# Altium PCB controler_pcb.PcbDoc
Units mil, origin at the board's own origin, x right, y up, seen from the top; angles counter-clockwise.
Board outline 1420 x 1860 mil, 2 copper layers (Top Layer, Bottom Layer); 10 components, 27 nets, 71 pads, 1 vias.
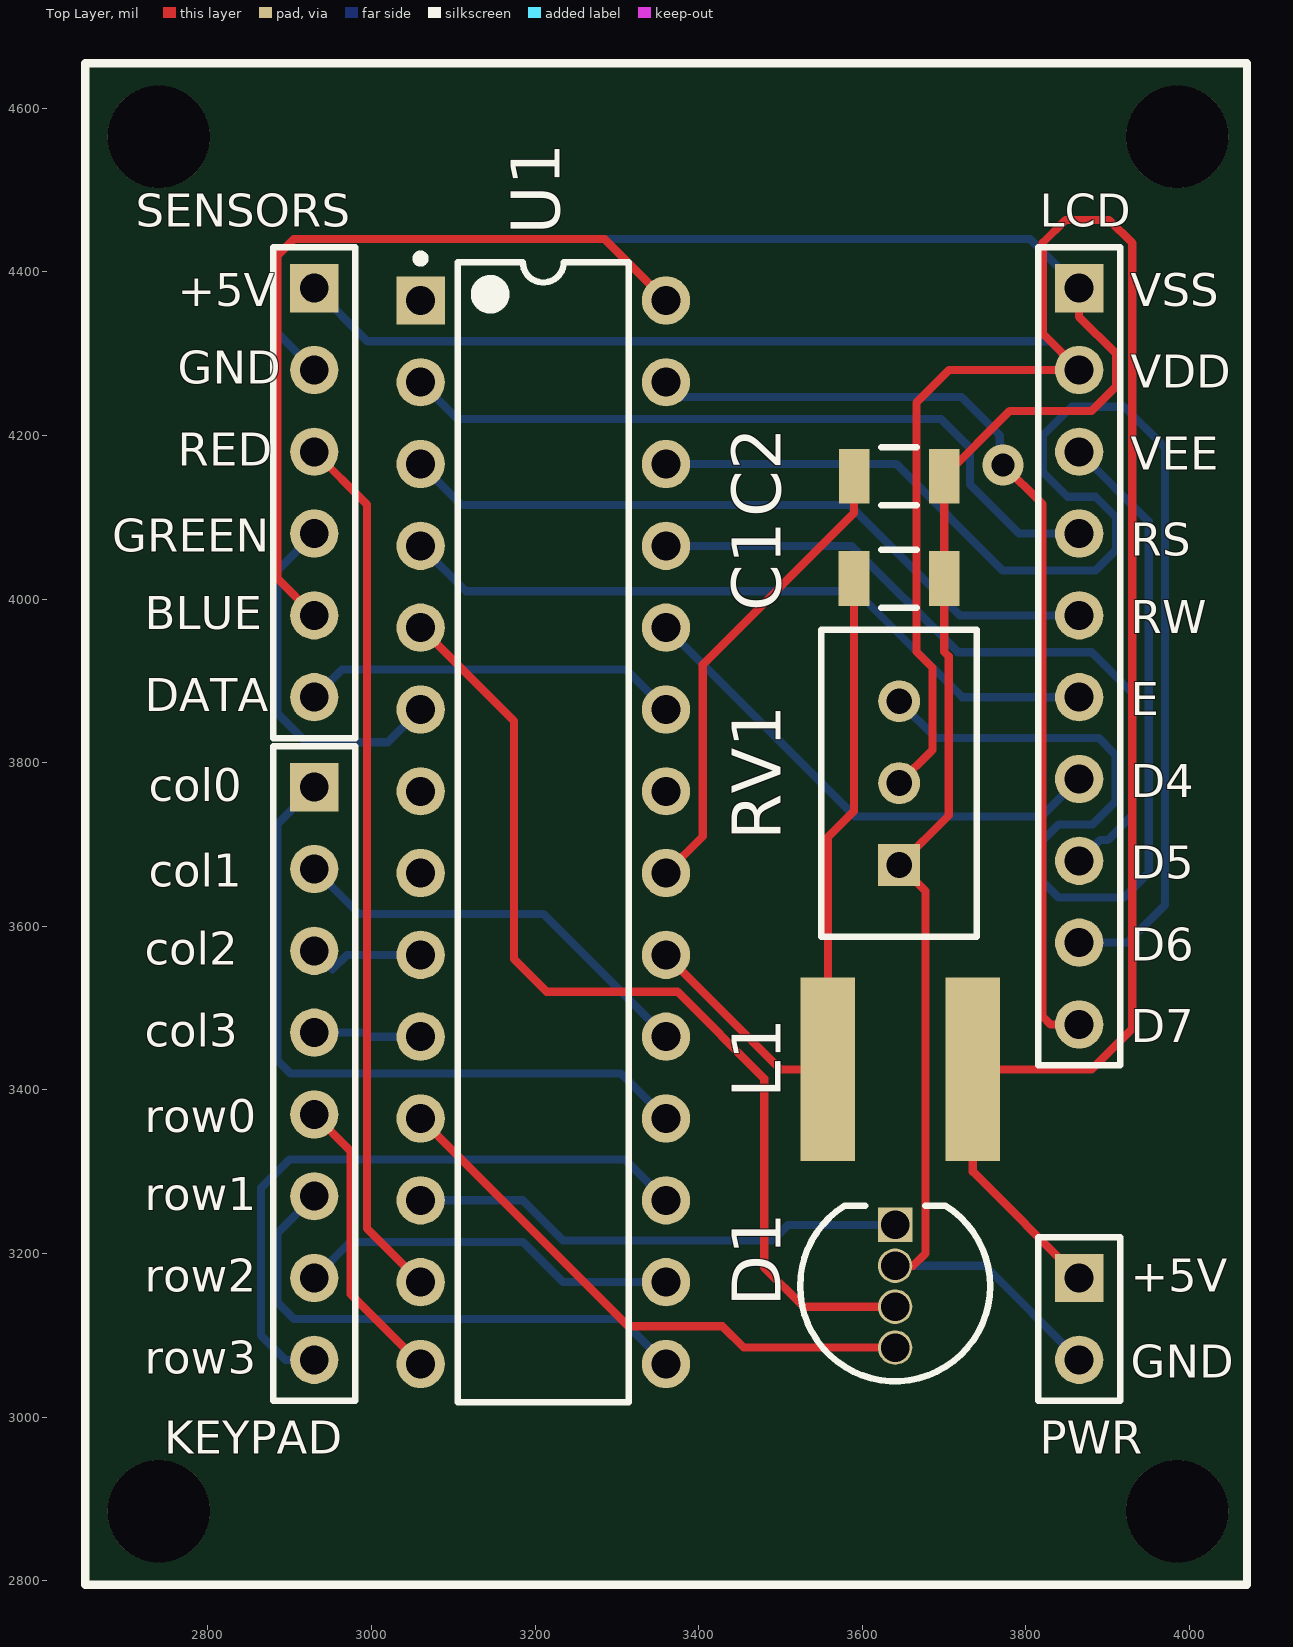
[diagram p0: Top Layer view]
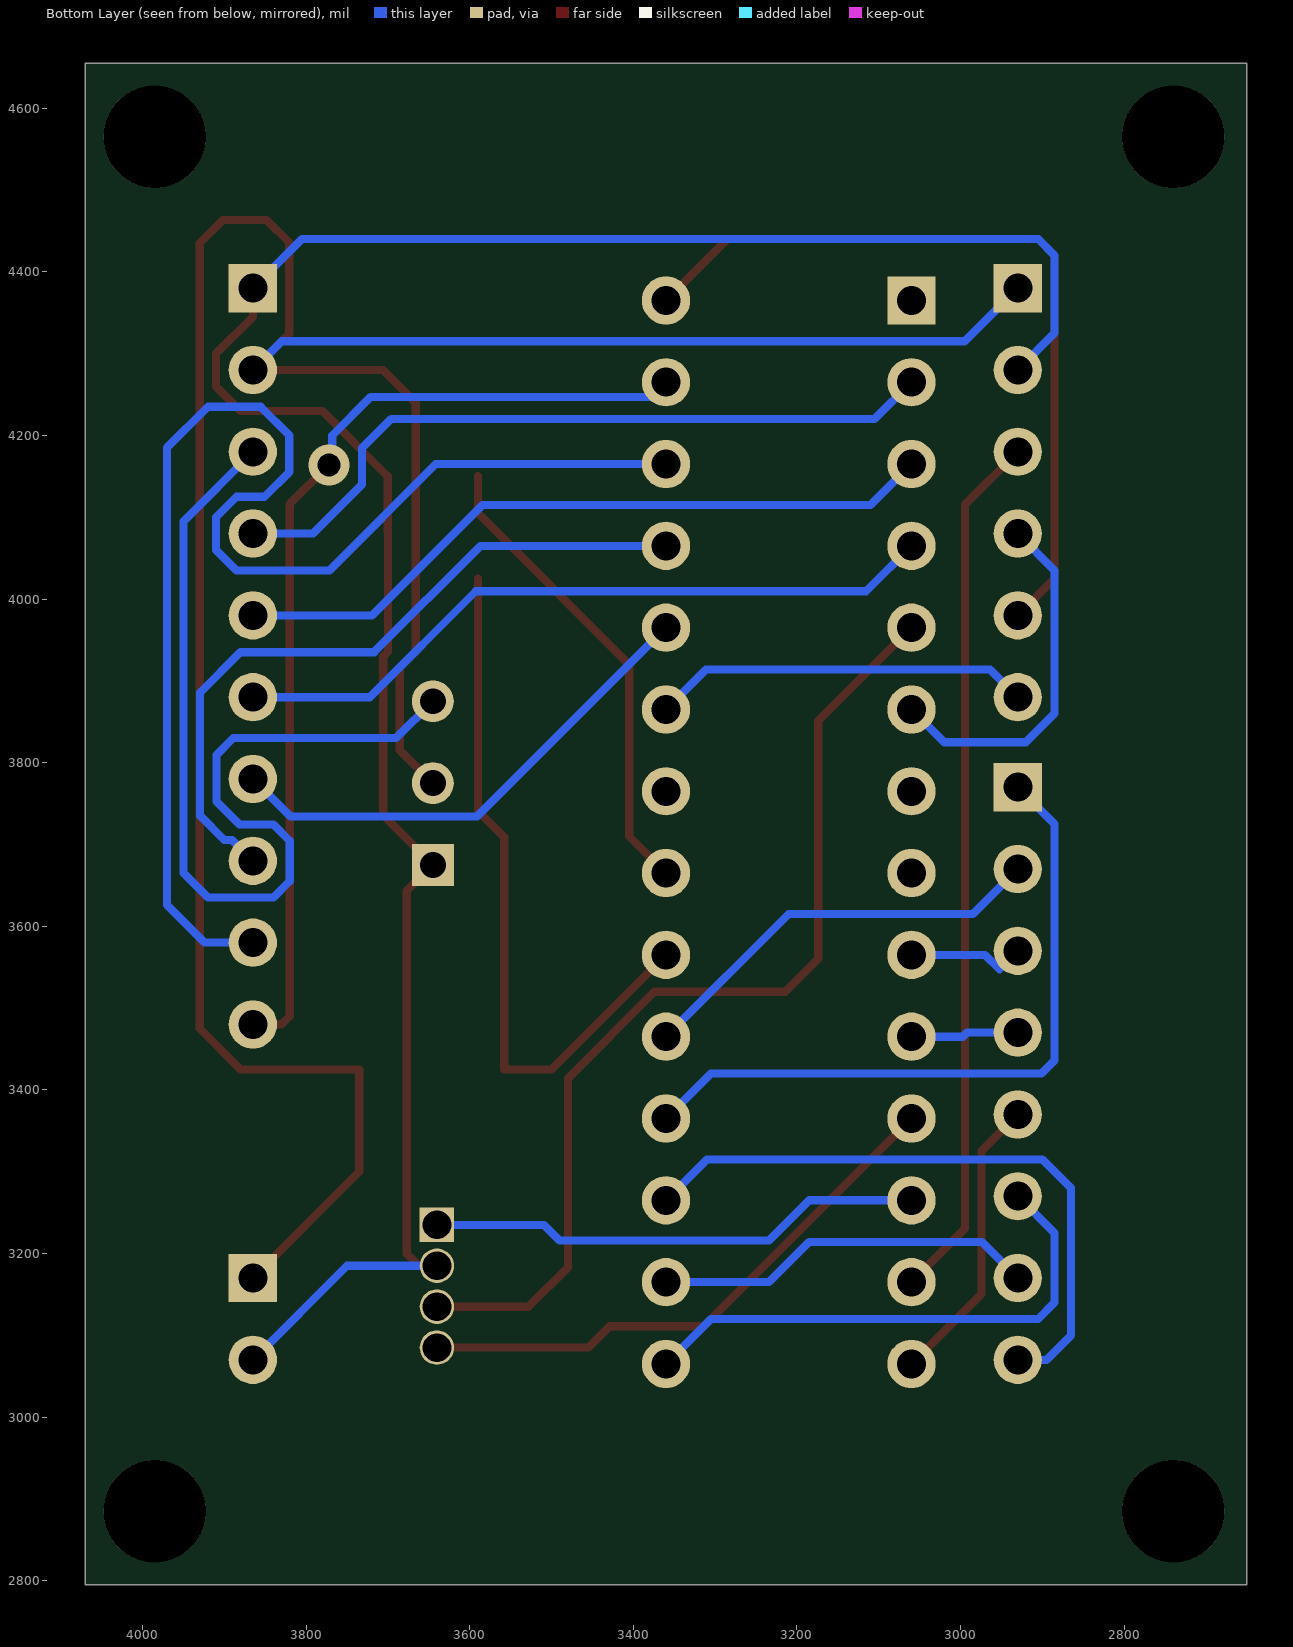
[diagram p1: Bottom Layer view, seen from below]

## Layer stack, top to bottom
Top Solder: solder mask 0.4, Solder Resist, Dk 3.5
Top Layer: signal copper 1.4
Dielectric 1: dielectric 12.6, FR-4, Dk 4.8
Bottom Layer: signal copper 1.4
Bottom Solder: solder mask 0.4, Solder Resist, Dk 3.5

## Board outline
2650,2795 2650,4655 4070,4655 4070,2795

## Design rules (kind name [scope] priority, off if disabled: settings)
Clearance [All] p1: gap=10 ignorepadtopadclearanceinfootprint=FALSE except(0: Arc-Hole Track-Hole SMDPad-Hole THPad-Hole Via-Hole Fill-Hole Poly-Hole Region-Hole Text-Hole)
PolygonConnect [All] p1: connectstyle=Relief reliefconductorwidth=10 reliefentries=4 polygonreliefangle="90 Angle" airgapwidth=10
RoutingVias [All] p1: holewidth=28 width=50 viastyle="Through Hole" minholewidth=28 minwidth=50 maxholewidth=28 maxwidth=50
SolderMaskExpansion [All] p1: expansion=4 istentingtop=FALSE
Width [All] p1: maxlimit=10 minlimit=10 preferedwidth=10
30 further rules are at their usual default settings.

## Components (designator, comment, footprint, x,y, rotation, side; value= is the part's Value field where it differs from the comment)
C1 "C1206C183J2GACAUTO" FP-C1206C-EB-MFG 3644.88,4025 r180 top value="18,000 pF"
C2 "C1206C183J2GACAUTO" FP-C1206C-EB-MFG 3645,4150 r0 top value="18,000 pF"
D1 "WP154A4SUREQBFZGC" KING-WP154A4SUREQBFZGC_V 3640,3160 r0 top
KEYPAD "PORTS KEYPAD" HDR1X8 2930,3770 r270 top (schematic designator "PORTS KEYPAD")
L1 "74404064100" "WE-LQS 6045" 3646.42,3425 r0 top
LCD "PORTS LCD" HDR1X10 3865,4380 r270 top (schematic designator "PORTS LCD")
PWR "PORTS POWER" HDR1X2 3865,3170 r270 top (schematic designator "PORTS POWER")
RV1 "3296W-1-102LF" BOUR-3296W-1-3 3645,3775 r90 top
SENSORS "PORTS SENSORS" HDR1X6 2930,4380 r270 top (schematic designator "PORTS SENSORS")
U1 "ATmega328P-PU" 28P3 3210,3715 r0 top

## Footprints (in the part's own frame and the unit in brackets; to place one, negate y for a bottom-side part, rotate by r counter-clockwise, add the part's x,y. Pads: shape width x height; smd on the part's side, far side on the other; paste and mask are expansions set on the pad)
28P3 [mm] "28-Pin Plastic Dual In-Line Package (PDIP)"
  rect 1.5x1.5 hole 0.9: 1(-3.81,16.51)
  round 1.5 hole 0.9: 2(-3.81,13.97) 3(-3.81,11.43) 4(-3.81,8.89) 5(-3.81,6.35) 6(-3.81,3.81) 7(-3.81,1.27) 8(-3.81,-1.27) 9(-3.81,-3.81) 10(-3.81,-6.35) 11(-3.81,-8.89) 12(-3.81,-11.43) 13(-3.81,-13.97) 14(-3.81,-16.51) 15(3.81,-16.51) 16(3.81,-13.97) 17(3.81,-11.43) 18(3.81,-8.89) 19(3.81,-6.35) 20(3.81,-3.81) 21(3.81,-1.27) 22(3.81,1.27) 23(3.81,3.81) 24(3.81,6.35) 25(3.81,8.89) 26(3.81,11.43) 27(3.81,13.97) 28(3.81,16.51)
  silkscreen extent -3.93,-17.7 2.65,17.93, body extent -3.6,-17.65 3.6,17.65, height 4.58
BOUR-3296W-1-3 [mm] "THD, 3-Leads, Body 9.53x4.83mm, Pitch 2.54mm"
  rect 1.3x1.3 hole 0.8: 1(-2.54,0)
  round 1.3 hole 0.8: 2(0,0) 3(2.54,0)
  silkscreen extent -4.76,-2.41 4.76,2.42, body extent -4.76,-2.41 4.76,2.42, height 11.55
FP-C1206C-EB-MFG [mm]
  rect 0.95x1.7 smd paste+0 mask+0: 1(-1.4,0) 2(1.4,0)
  silkscreen extent -0.55,-0.9 0.55,0.9, body extent -2,-1 2,1, height 0.25
HDR1X2 [mm] "Connector; Header; 2 Position"
  rect 1.5x1.5 hole 0.9: 1(0,0)
  round 1.5 hole 0.9: 2(2.54,0)
  silkscreen extent -1.27,-1.27 3.81,1.27
HDR1X6 [mm] "Connector; Header; 6 Position"
  rect 1.5x1.5 hole 0.9: 1(0,0)
  round 1.5 hole 0.9: 2(2.54,0) 3(5.08,0) 4(7.62,0) 5(10.16,0) 6(12.7,0)
  silkscreen extent -1.27,-1.27 13.97,1.27
HDR1X8 [mm] "Connector; Header; 8 Position"
  rect 1.5x1.5 hole 0.9: 1(0,0)
  round 1.5 hole 0.9: 2(2.54,0) 3(5.08,0) 4(7.62,0) 5(10.16,0) 6(12.7,0) 7(15.24,0) 8(17.78,0)
  silkscreen extent -1.27,-1.27 19.05,1.27
HDR1X10 [mm] "Connector; Header; 10 Position"
  rect 1.5x1.5 hole 0.9: 1(0,0)
  round 1.5 hole 0.9: 2(2.54,0) 3(5.08,0) 4(7.62,0) 5(10.16,0) 6(12.7,0) 7(15.24,0) 8(17.78,0) 9(20.32,0) 10(22.86,0)
  silkscreen extent -1.27,-1.27 24.13,1.27
KING-WP154A4SUREQBFZGC_V [mm] "THD, 4-Leads, Dia 5.9mm, Pitch 1.27mm"
  rect 1.07x1.07 hole 0.889 paste+0: 1(0,1.905)
  round 1.07 hole 0.889 paste+0: 2(0,0.635) 3(0,-0.635) 4(0,-1.905)
  silkscreen extent -2.95,-2.95 2.95,2.5
"WE-LQS 6045" [mm] "SMD Power Inductor, 2-Leads, Body 6.0x6.0mm"
  rect 1.7x5.7 smd: 1(-2.25,0) 2(2.25,0)
  body extent -3,-3 3,3, height 4.47

## Part data
C1 C2: library part CMP-03020-017738-1, "CAP CER 0.018UF 200V NP0 1206", Capacitance="18,000 pF", Manufacturer=KEMET, Package=C1206C-EB, Temperature="-55°C to +150°C", Temperature Characteristic=C0G, Temperature Coefficient=15%, Temperature Range High=+150°C, Temperature Range Low=-55°C, Tolerance=0.05, Voltage Rating="200 V", Automotive=Yes, Automotive Grade="Grade 0", Category=Cap, ComponentLink2Description=Datasheet, ComponentLink2URL=https://content.kemet.com/datasheets/KEM_C1007_X8R_ULTRA_150C_SMD.pdf, Device Class L1="Passive Components", Device Class L2=Capacitors, Device Class L3="Ceramic Capacitors", Digikey Description="CAP CER 0.018UF 200V NP0 1206", Height=0.88mm, Ipc Land Pattern Name=CAPC320160X78, Lead Free=Yes, Manufacturer Part Number=C1206C183J2GACAUTO, Material=Ceramic, Mouser Description="Multilayer Ceramic Capacitors MLCC - SMD/SMT 200volts 18000pF 5% AUTO", Octopart=https://octopart.com/c1206c183j2gacauto-kemet-46732638, RoHS=TRUE
D1: library part CMP-2000-07415-1, "Full Color LED Lamp, Dominant Wavelength RGB 630 / 525 / 465 nm, -40 to 85 degC, 4-Pin THD, RoHS", Color=Red,Green,Blue(RGB), Current - Test=20mA, Manufacturer=Kingbright, Millicandela Rating=1300mcdRed,1700mcdGreen,900mcdBlue, Package / Case=Radial-4Leads, Package Description="4-Pin Through Hole LED, Dia 5.9 mm, Pitch 1.27 mm", Standard Package=500, Voltage - Forward (Vf) (Typ)=1.9VRed,3.3VGreen,3.3VBlue, 3D Model="WP154A4SUREQBFZGW.sldprt /  / WP154A4SUREQBFZGW.pro /  / WP154A4SUREQBFZGW.igs /  / WP154A4SUREQBFZGW.stp", Category=Optoelectronics, Datasheet URL=https://www.kingbrightusa.com/images/catalog/spec/WP154A4SUREQBFZGC.pdf, Datasheet Version="Rev. 5A, 08/2014", Family=LEDIndication-Discrete, Height=8.60mm, Lens Style/Size=RoundwithDomedTop,5mm,T-13/4, Lens Type=Clear, Manufacturer URL=http://www.kingbright.com/, Mounting Technology=ThroughHole, Mounting Type=ThroughHole, Online Catalog=5mm,T-13/4(RGB)RoundwithDomedTopLEDLamp, Other Names="754-1615 / WP154A4SUREQBFZGC-ND", Package Reference=WP154A4SUREQBFZGC, Packaging=Bulk, Viewing Angle=50°, Wavelength - Dominant=630nm,525nm,465nm, Wavelength - Peak=645nm,515nm,460nm
KEYPAD: library part "Header 8", "Header, 8-Pin", LatestRevisionDate=17-Jul-2002, LatestRevisionNote="Re-released for DXP Platform.", Publisher="Altium Limited"
L1: library part CMP-1354-00072-1, "WE-LQS SMD Power Inductor, L=10.0 µH", Inductance="10.0 ÂµH", Manufacturer="Wuerth Elektronik", ComponentLink1Description="Manufacturer URL", ComponentLink1URL=http://www.we-online.com, ComponentLink2Description=Datasheet, ComponentLink2URL=http://katalog.we-online.de/pbs/datasheet/74404064100.pdf, PackageReference="WE-LQS 6045", PartNumber=74404064100
LCD: library part "Header 10", "Header, 10-Pin", LatestRevisionDate=17-Jul-2002, LatestRevisionNote="Re-released for DXP Platform.", Publisher="Altium Limited"
PWR: library part "Header 2", "Header, 2-Pin", LatestRevisionDate=17-Jul-2002, LatestRevisionNote="Re-released for DXP Platform.", Publisher="Altium Limited"
RV1: library part CMP-1747-00002-1, "Square Trimpot(R) Trimming Potentiometer, 1000 Ohm, -55 to 125 degC, 3-Pin THD, RoHS, Tube", Case Code (Imperial)=0603, Case Code (Metric)=1608, Max Operating Temperature="155 degC", Min Operating Temperature="-55 degC", Package Quantity=5000, Power Rating="100 mW", Resistance="4.7 kohm", Tolerance=1%, Voltage Rating="75 V", Case\Package=0603, ComponentLink1Description="Manufacturer URL", ComponentLink1URL=http://www.bourns.com/, ComponentLink2Description=Datasheet, ComponentLink2URL=http://www.bourns.com/docs/Product-Datasheets/3296.pdf, DatasheetVersion=May-16, Height="0.45 mm", Length="1.6 mm", Mount="Surface Mount", PackageDescription="3-Pin Through Hole Device, Body 9.53 x 4.83 mm, Pitch 2.54 mm", PackageReference=3296W-1-3, Packaging="Tape and Reel", Pins=2, Radiation Hardening=No, REACH SVHC=Yes, RoHSCompliant=true, Weight="7.1E-05 oz", Width="0.8 mm"
SENSORS: library part "Header 6", "Header, 6-Pin", LatestRevisionDate=17-Jul-2002, LatestRevisionNote="Re-released for DXP Platform.", Publisher="Altium Limited"
U1: library part CMP-0095-00013-2, "8-bit AVR Microcontroller, 32KB Flash, 1KB EEPROM, 2KB SRAM, 28-pin PDIP, Industrial Grade (-40°C to 85°C)", ComponentLink1Description="Manufacturer URL", ComponentLink1URL=http://www.atmel.com/, ComponentLink2Description="ATmega48A/48PA/88A/88PA/168A/168PA/328/328P Datasheet", ComponentLink2URL=http://www.atmel.com/dyn/resources/prod_documents/8271.pdf, ComponentLink3Description="ATmega48A/48PA/88A/88PA/168A/168PA/328/328P Summary", ComponentLink3URL=http://www.atmel.com/dyn/resources/prod_documents/8271S.pdf, DatasheetVersion="revD, May-2011", PackageDescription="28-lead (0.300\"/7.62mm Wide) Plastic Dual Inline Package (PDIP)", PackageReference=28P3, PackageVersion="revB, Sep-2001", RevisionNote="DatasheetVersion updated. URLs added."

## Free pads (board coordinates)
  round 125 hole 125: 11(3985,4565) 12(2740,4565) 13(2740,2885) 14(3985,2885)

## Via types
v1: diameter 50, hole 28, Top Layer to Bottom Layer, 1 vias

## Nets (pads, with @x,y where several pads share a name; then routed paths per layer and width w, separated by ;. In a path a pad name is that pad's centre, name@x,y a point inside that pad or via, vN(x,y) a via of type N, cw(c..) or ccw(c..) an arc to the next point about the centre after c; other vN are vias at no path point)
+5: L1.2 LCD.2 PWR.1 RV1.2 SENSORS.1 | length 3473.2
  Top Layer w10: RV1.2 3685.59,3815.59 3685.59,3916 3666,3935.59 3666,4240 3706,4280 LCD.2 3820.47,4324.53 3820.47,4435.47 3848.36,4463.36 3901.64,4463.36 3930,4435 3930,3475 3880,3425 L1.2 3735,3300 PWR.1
  Bottom Layer w10: SENSORS.1 2995,4315 3830,4315 LCD.2
BLUE: SENSORS.5 U1.28 | length 973
  Top Layer w10: SENSORS.5 2885,4025 2885,4420 2905,4440 3285,4440 U1.28
col0: KEYPAD.1 U1.18 | length 857
  Bottom Layer w10: KEYPAD.1 2885,3725 2885,3436 2901,3420 3305,3420 U1.18
col1: KEYPAD.2 U1.19 | length 514.9
  Bottom Layer w10: KEYPAD.2 2985,3615 3210,3615 U1.19
col2: KEYPAD.3 U1.9 | length 146.6
  Bottom Layer w10: KEYPAD.3 2952.5,3547.5 2970,3565 U1.9
col3: KEYPAD.4 U1.10 | length 132.1
  Bottom Layer w10: KEYPAD.4 2992,3470 2997,3465 U1.10
D4: LCD.7 U1.24 | length 619.7
  Bottom Layer w10: U1.24 3591,3734 3819,3734 LCD.7
D5: LCD.8 U1.25 | length 881.6
  Bottom Layer w10: U1.25 3586.71,4065 3716.71,3935 3880,3935 3929.53,3885.47 3929.53,3735.15 3900,3705.62 3890.62,3705.62 LCD.8
D6: LCD.9 U1.26 | length 1679
  Bottom Layer w10: U1.26 3641.51,4165 3771.51,4035 3885,4035 3910,4060 3910,4100 3885,4125 3851,4125 3820.47,4155.53 3820.47,4200 3855.47,4235 3920,4235 3970,4185 3970,3626 3924,3580 LCD.9
D7: LCD.10 U1.27 | length 1215.6
  Top Layer w10: v1(3772,4164) 3820,4116 3820,3490 3830,3480 LCD.10
  Bottom Layer w10: U1.27 3378,4247 3721,4247 3768,4200 3768,4168 v1(3772,4164)
DATA: SENSORS.6 U1.23 | length 464.4
  Bottom Layer w10: SENSORS.6 2964,3914 3311,3914 U1.23
E: LCD.6 U1.4 | length 881.6
  Bottom Layer w10: U1.4 3115.47,4009.53 3592.56,4009.53 3722.09,3880 LCD.6
GND: C1.1 C2.2 D1.2 LCD.1 PWR.2 RV1.1 SENSORS.2 | length 2872.4
  Top Layer w10: D1.2 3662,3185 3677,3200 3677,3643 RV1.1 3705.59,3735.59 3705.59,3930 3700,3935.59 C1.1 3700,4081.53 3700.12,4081.65 C2.2 3780.12,4230 3880,4230 3910,4260 3910,4300 3865,4345 LCD.1
  Bottom Layer w10: SENSORS.2 2885,4325 2885,4420 2905,4440 3805,4440 LCD.1 ; D1.2 3750,3185 PWR.2
GREEN: SENSORS.4 U1.6 | length 444.7
  Bottom Layer w10: SENSORS.4 2885,4035 2885,3860 2920,3825 3020,3825 U1.6
NetC1_2: C1.2 L1.1 U1.20 | length 869
  Top Layer w10: U1.20 3500,3425 L1.1 3557.83,3709 3589.76,3740.93 C1.2
NetC2_1: C2.1 U1.21 | length 580.2
  Top Layer w10: U1.21 3405,3710 3405,3920.12 3589.88,4105 C2.1
NetD1_1: D1.1 U1.12 | length 608.2
  Bottom Layer w10: U1.12 3185,3265 3234,3216 3490,3216 3509,3235 D1.1
NetD1_3: D1.3 U1.5 | length 1229.6
  Top Layer w10: U1.5 3174,3851 3174,3560 3214,3520 3374,3520 3480,3414 3480,3183 3528,3135 D1.3
NetD1_4: D1.4 U1.11 | length 696
  Top Layer w10: U1.11 3314,3111 3429,3111 3455,3085 D1.4
RED: SENSORS.3 U1.13 | length 1068.8
  Top Layer w10: SENSORS.3 2994.53,4115.47 2994.53,3230.47 U1.13
row0: KEYPAD.5 U1.14 | length 358.8
  Top Layer w10: KEYPAD.5 2974.53,3325.47 2974.53,3150.47 U1.14
row1: KEYPAD.6 U1.15 | length 654.7
  Bottom Layer w10: KEYPAD.6 2885,3225 2885,3140 2905,3120 3305,3120 U1.15
row2: KEYPAD.7 U1.16 | length 468.5
  Bottom Layer w10: KEYPAD.7 2974,3214 3185,3214 3234,3165 U1.16
row3: KEYPAD.8 U1.17 | length 787.6
  Bottom Layer w10: KEYPAD.8 2895,3070 2865,3100 2865,3280 2900,3315 3310,3315 U1.17
RS: LCD.4 U1.2 | length 907.7
  Bottom Layer w10: U1.2 3105,4220 3695.94,4220 3731.48,4184.46 3731.48,4140 3791.48,4080 LCD.4
RW: LCD.5 U1.3 | length 881.6
  Bottom Layer w10: U1.3 3110,4115 3584.42,4115 3719.42,3980 LCD.5
VEE: LCD.3 RV1.3 | length 1208.5
  Bottom Layer w10: RV1.3 3690,3830 3889,3830 3909.53,3809.47 3909.53,3752.53 3881.53,3724.53 3840,3724.53 3820,3704.53 3820,3655 3840,3635 3920,3635 3950,3665 3950,4095 LCD.3
pads on no net: U1.1 U1.7 U1.8 U1.22

## Silkscreen, mask and mechanical layers (free items; w line width, h text height)
Top Overlay:
  the board outline again, w10
  text "+5V" at 2763,4358 h40
  text "VSS" at 3928,4358 h40
  text "GND" at 2763,4263 h40
  text "VDD" at 3928,4258 h40
  text "RED" at 2763,4163 h40
  text "VEE" at 3928,4158 h40
  text "GREEN" at 2683,4058 h40
  text "RS" at 3928,4053 h40
  text "BLUE" at 2723,3963 h40
  text "RW" at 3928,3958 h40
  text "DATA" at 2723,3863 h40
  text "E" at 3928,3858 h40
  text "D4" at 3928,3758 h40
  text "col0" at 2728,3753 h40
  text "D5" at 3928,3658 h40
  text "col1" at 2728,3648 h40
  text "D6" at 3928,3558 h40
  text "col2" at 2723,3553 h40
  text "D7" at 3928,3458 h40
  text "col3" at 2723,3453 h40
  text "row0" at 2723,3348 h40
  text "row1" at 2723,3253 h40
  text "row2" at 2723,3153 h40
  text "+5V" at 3928,3153 h40
  text "row3" at 2723,3053 h40
  text "GND" at 3928,3048 h40